# Altium PCB SENSEI_Base-Board.PcbDoc (part 6 of 10)
Units mm, origin at the board's own origin, x right, y up, seen from the top; angles counter-clockwise.
Board outline 51.6 x 28.1 mm, 8 copper layers (Top Sig/Pwr, GND1, Sig1, GND2, Sig2, Pwr, GND3, Bot Sig/Pwr), stack 1.53 mm thick; 209 components, 201 nets, 1031 pads, 2222 vias.
Unrouted connection lines stored in the file: 214.
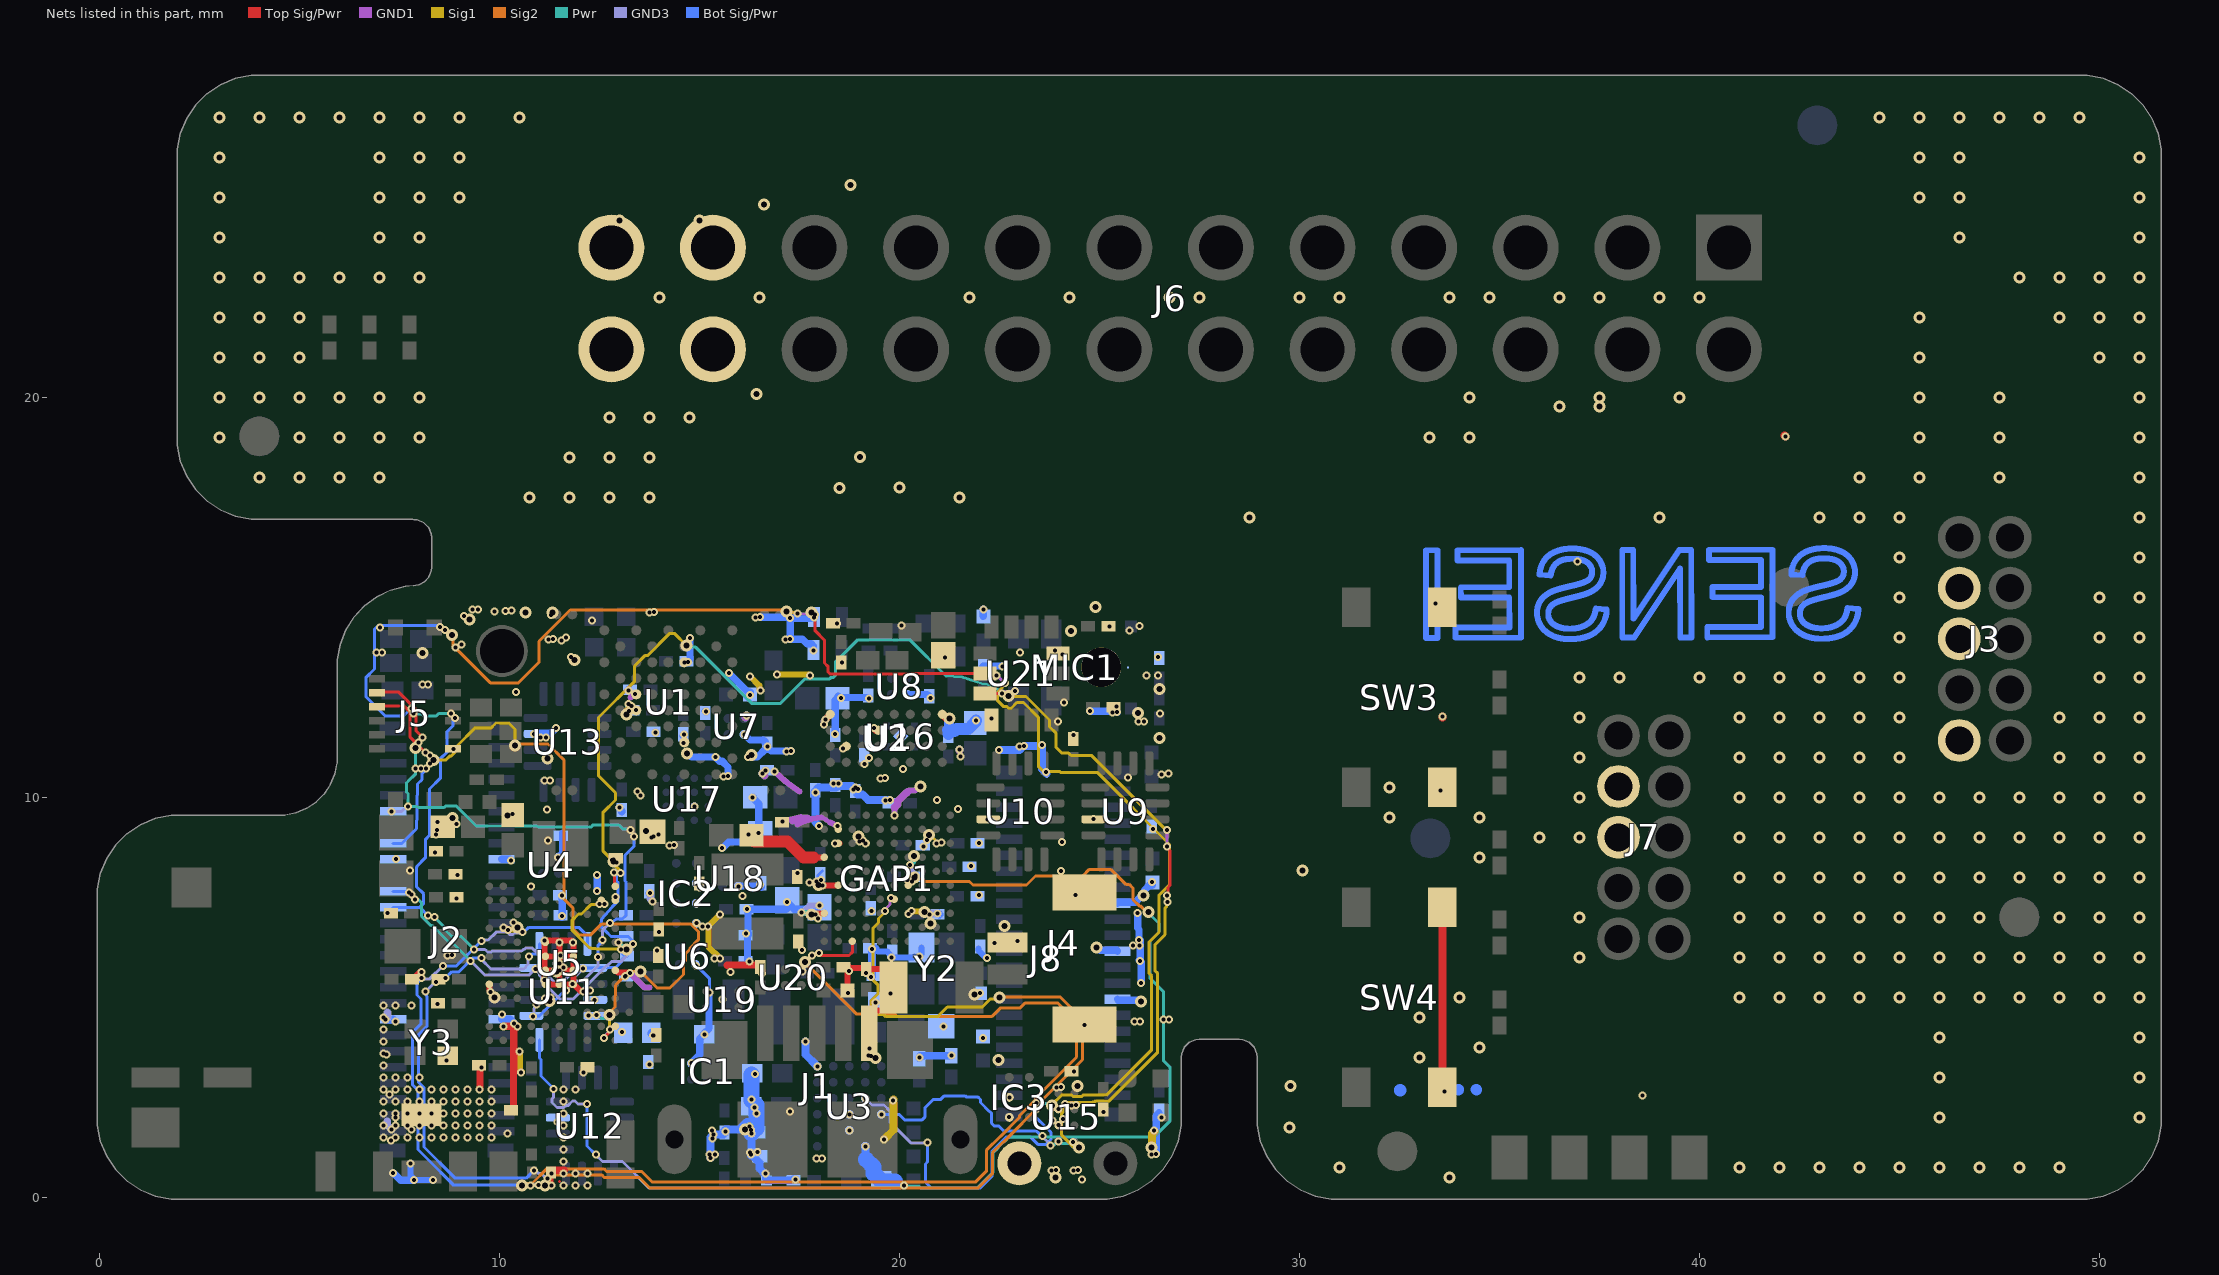
[diagram p11: the nets of this part, all layers, seen from the top]

## Via types
v1: diameter 0.2, hole 0.1, Top Sig/Pwr to GND1, 544 vias
v2: diameter 0.2, hole 0.1, GND3 to Bot Sig/Pwr, 436 vias
v3: diameter 0.2, hole 0.1, GND1 to Sig1, 385 vias
v4: diameter 0.3, hole 0.15, Sig1 to Pwr, 293 vias
v5: diameter 0.3, hole 0.15, Top Sig/Pwr to Bot Sig/Pwr, tented both sides, 284 vias
v6: diameter 0.2, hole 0.1, Pwr to GND3, 280 vias

## Nets (pads, with @x,y where several pads share a name; then routed paths per layer and width w, separated by ;. In a path a pad name is that pad's centre, name@x,y a point inside that pad or via, vN(x,y) a via of type N, cw(c..) or ccw(c..) an arc to the next point about the centre after c; other vN are vias at no path point) (continued)
GND: (continued)
  Bot Sig/Pwr w0.146: 42.679,15.182 42.68,15.183 42.682,15.183 42.683,15.184 42.685,15.184 42.686,15.185 42.688,15.185 42.689,15.186 42.691,15.187 42.692,15.187 42.694,15.188 42.695,15.188 42.697,15.189 42.699,15.189 42.7,15.19 42.702,15.19 42.703,15.191 42.705,15.191 42.706,15.192 42.708,15.192 42.71,15.193 42.711,15.193 42.713,15.194 42.714,15.194 42.716,15.195 42.718,15.195 42.719,15.196 42.721,15.197 42.723,15.197 42.724,15.198 42.726,15.198 42.728,15.199 42.729,15.199 42.731,15.2 42.733,15.2 42.734,15.201 42.736,15.201 42.738,15.202 42.739,15.202 42.741,15.203 42.743,15.204 42.745,15.204 42.746,15.205 42.748,15.205 42.75,15.206 42.752,15.206 42.754,15.207 42.755,15.207 42.757,15.208 42.759,15.208 42.761,15.209 42.763,15.21 42.764,15.21 42.766,15.211 42.768,15.211 42.77,15.212 42.772,15.212 42.774,15.213 42.775,15.213 42.777,15.214 42.779,15.215 42.781,15.215 42.783,15.216 42.785,15.216 42.787,15.217 42.789,15.217 42.791,15.218 42.793,15.218 42.795,15.219 42.796,15.22 42.798,15.22 42.8,15.221 42.802,15.221 42.804,15.222 42.806,15.222 42.808,15.223 42.81,15.224 42.812,15.224 42.814,15.225 42.817,15.225 42.819,15.226 42.822,15.227 42.824,15.228 42.827,15.228 42.83,15.229 42.832,15.23 42.835,15.23 42.837,15.231 42.84,15.232 42.843,15.233 42.845,15.233 42.848,15.234 42.851,15.235 42.853,15.235 42.856,15.236 42.859,15.237 42.861,15.238 42.864,15.238 42.867,15.239 42.87,15.24 42.872,15.241 42.875,15.241 42.878,15.242 42.881,15.243 42.883,15.244 42.886,15.244 42.889,15.245 42.892,15.246 42.895,15.246 42.898,15.247 42.9,15.248 42.903,15.249 42.906,15.249 42.909,15.25 42.912,15.251 42.915,15.252 42.918,15.252 42.921,15.253 42.924,15.254 42.927,15.255 42.93,15.255 42.933,15.256 42.936,15.257 42.939,15.258 42.942,15.258 42.945,15.259 42.948,15.26 42.951,15.261 42.954,15.262 42.957,15.262 42.96,15.263 42.963,15.264 42.966,15.265 42.969,15.265 42.972,15.266 42.976,15.267 42.979,15.268 42.982,15.268 42.985,15.269 42.988,15.27 42.991,15.271 42.995,15.272 42.999,15.273 43.003,15.274 43.007,15.274 43.011,15.275 43.015,15.276 43.019,15.277 43.023,15.278 43.027,15.279 43.031,15.28 43.035,15.281 43.039,15.282 43.043,15.283 43.047,15.284 43.051,15.285 43.055,15.286 43.059,15.287 43.063,15.288 43.067,15.289 43.071,15.29 43.076,15.291 43.08,15.292 43.084,15.292 43.088,15.293 43.092,15.294 43.096,15.295 43.1,15.296 43.103,15.297 43.107,15.298 43.11,15.298 43.113,15.299 43.117,15.3 43.12,15.301 43.124,15.302 43.127,15.302 43.131,15.303 43.134,15.304 43.137,15.305 43.141,15.306 43.144,15.306 43.147,15.307 43.151,15.308 43.154,15.309 43.157,15.31 43.16,15.31 43.164,15.311 43.167,15.312 43.17,15.313 43.173,15.314 43.177,15.314 43.18,15.315 43.183,15.316 43.186,15.317 43.189,15.318 43.192,15.318 43.195,15.319 43.199,15.32 43.202,15.321 43.205,15.322 43.208,15.322 43.21,15.323 43.213,15.324 43.215,15.324 43.217,15.325 43.22,15.326 43.222,15.326 43.225,15.327 43.227,15.328 43.229,15.328 43.232,15.329 43.234,15.329 43.237,15.33 43.239,15.331 43.241,15.331 43.243,15.332 43.246,15.333 43.248,15.333 43.25,15.334 43.253,15.335 43.255,15.335 43.257,15.336 43.26,15.336 43.262,15.337 43.264,15.338 43.266,15.338 43.268,15.339 43.271,15.34 43.273,15.34 43.275,15.341 43.277,15.342 43.279,15.342 43.282,15.343 43.284,15.343 43.286,15.344 43.288,15.345 43.29,15.345 43.292,15.346 43.294,15.347 43.297,15.347 43.299,15.348 43.301,15.349 43.303,15.349 43.305,15.35 43.307,15.35 43.309,15.351 43.311,15.352 43.313,15.352 43.315,15.353 43.317,15.354 43.319,15.354 43.321,15.355 43.323,15.355 43.325,15.356 43.327,15.357 43.329,15.357 43.331,15.358 43.333,15.359 43.335,15.359 43.337,15.36 43.339,15.361 43.341,15.361 43.343,15.362 43.345,15.362 43.347,15.363 43.349,15.364 43.35,15.364 43.352,15.365 43.354,15.366 43.356,15.366 43.358,15.367 43.36,15.367 43.362,15.368 43.363,15.369 43.365,15.369 43.367,15.37 43.369,15.371 43.371,15.371 43.372,15.372 43.374,15.372 43.376,15.373 43.378,15.374 43.379,15.374 43.381,15.375 43.382,15.375 43.383,15.376 43.385,15.376 43.386,15.377 43.387,15.377 43.388,15.378 43.39,15.378 43.391,15.379 43.392,15.379 43.393,15.38 43.395,15.38 43.396,15.38 43.397,15.381 43.398,15.381 43.4,15.382 43.401,15.382 43.402,15.383 43.403,15.383 43.404,15.384 43.406,15.384 43.407,15.385 43.408,15.385 43.409,15.386 43.41,15.386 ; 42.9,14.945 42.902,14.946 42.903,14.946 42.905,14.947 42.906,14.947 42.908,14.948 42.91,14.948 42.911,14.948 42.913,14.949 42.914,14.949 42.916,14.95 42.917,14.95 42.919,14.951 42.921,14.951 42.922,14.951 42.924,14.952 42.925,14.952 42.927,14.953 42.929,14.953 42.93,14.954 42.932,14.954 42.934,14.955 42.935,14.955 42.937,14.955 42.939,14.956 42.94,14.956 42.942,14.957 42.944,14.957 42.945,14.958 42.947,14.958 42.949,14.959 42.95,14.959 42.952,14.96 42.954,14.96 42.956,14.96 42.957,14.961 42.959,14.961 42.961,14.962 42.963,14.962 42.964,14.963 42.966,14.963 42.968,14.964 42.97,14.964 42.972,14.965 42.973,14.965 42.975,14.966 42.977,14.966 42.979,14.967 42.981,14.967 42.983,14.968 42.984,14.968 42.986,14.969 42.988,14.969 42.99,14.969 42.992,14.97 42.994,14.97 42.996,14.971 42.997,14.971 42.999,14.972 43.001,14.972 43.003,14.973 43.005,14.973 43.007,14.974 43.009,14.974 43.011,14.975 43.013,14.975 43.015,14.976 43.017,14.976 43.019,14.977 43.021,14.977 43.023,14.978 43.025,14.978 43.027,14.979 43.029,14.979 43.031,14.98 43.033,14.98 43.035,14.981 43.037,14.982 43.04,14.982 43.042,14.983 43.045,14.984 43.048,14.984 43.05,14.985 43.053,14.986 43.055,14.986 43.058,14.987 43.061,14.987 43.063,14.988 43.066,14.989 43.069,14.989 43.071,14.99 43.074,14.991 43.077,14.992 43.079,14.992 43.082,14.993 43.085,14.994 43.088,14.994 43.09,14.995 43.093,14.996 43.096,14.996 43.099,14.997 43.101,14.998 43.104,14.998 43.107,14.999 43.11,15 43.113,15 43.116,15.001 43.118,15.002 43.121,15.003 43.124,15.003 43.127,15.004 43.13,15.005 43.133,15.005 43.136,15.006 43.139,15.007 43.142,15.007 43.145,15.008 43.148,15.009 43.151,15.01 43.154,15.01 43.157,15.011 43.16,15.012 43.162,15.012 43.166,15.013 43.169,15.014 43.173,15.015 43.176,15.016 43.18,15.017 43.183,15.018 43.187,15.019 43.191,15.019 43.194,15.02 43.198,15.021 43.201,15.022 43.204,15.023 43.208,15.024 43.211,15.025 43.215,15.025 43.218,15.026 43.222,15.027 43.225,15.028 43.228,15.029 43.232,15.03 43.235,15.031 43.238,15.032 43.242,15.032 43.245,15.033 43.248,15.034 43.252,15.035 43.255,15.036 43.258,15.037 43.261,15.038 43.265,15.038 43.268,15.039 43.271,15.04 43.274,15.041 43.277,15.042 43.281,15.043 43.284,15.044 43.287,15.044 43.29,15.045 43.293,15.046 43.296,15.047 43.299,15.048 43.302,15.049 43.305,15.049 43.308,15.05 43.311,15.051 43.313,15.052 43.316,15.052 43.318,15.053 43.321,15.054 43.323,15.055 43.326,15.055 43.328,15.056 43.331,15.057 43.333,15.057 43.336,15.058 43.338,15.059 43.341,15.059 43.343,15.06 43.345,15.061 43.348,15.062 43.35,15.062 43.353,15.063 43.355,15.064 43.357,15.064 43.36,15.065 43.362,15.066 43.364,15.066 43.367,15.067 43.369,15.068 43.371,15.069 43.374,15.069 43.376,15.07 43.378,15.071 43.38,15.071 43.383,15.072 43.385,15.073 43.387,15.073 43.389,15.074 43.392,15.075 43.394,15.075 43.396,15.076 43.398,15.077 43.4,15.078 43.403,15.078 43.405,15.079 43.407,15.08 43.409,15.08 43.411,15.081 43.413,15.082 43.415,15.082 43.418,15.083 43.42,15.084 43.422,15.084 43.424,15.085 43.426,15.086 43.428,15.086 43.43,15.087 43.432,15.088 43.434,15.089 43.436,15.089 43.438,15.09 43.44,15.091 43.442,15.091 43.444,15.092 43.446,15.093 43.448,15.093 43.45,15.094 43.452,15.095 43.454,15.095 43.455,15.096 43.457,15.096 43.458,15.097 43.46,15.097 43.461,15.098 43.463,15.098 43.464,15.099 43.466,15.1 43.467,15.1 43.469,15.101 43.47,15.101 43.472,15.102 43.473,15.102 43.475,15.103 43.476,15.103 43.478,15.104 43.479,15.104 43.481,15.105 43.482,15.105 43.484,15.106 43.485,15.107 43.487,15.107 43.488,15.108 43.489,15.108 43.491,15.109 43.492,15.109 43.494,15.11 43.495,15.11 43.496,15.111 43.498,15.111 43.499,15.112 43.501,15.112 43.502,15.113 43.503,15.114 43.505,15.114 43.506,15.115 43.507,15.115 43.509,15.116 43.51,15.116 43.511,15.117 43.513,15.117 43.514,15.118 43.515,15.118 43.517,15.119 43.518,15.119 43.519,15.12 43.521,15.12 43.522,15.121 43.523,15.122 43.524,15.122 43.526,15.123 43.527,15.123 43.528,15.124 43.529,15.124 43.531,15.125 43.532,15.125 43.533,15.126 43.534,15.126 43.536,15.127 43.537,15.127 43.538,15.128 43.539,15.128 43.54,15.129 ; 43.493,15.878 43.49,15.88 43.488,15.882 43.485,15.883 43.483,15.885 43.48,15.887 43.478,15.889 43.476,15.89 43.473,15.892 43.471,15.893 43.469,15.895 43.466,15.896 43.464,15.898 43.462,15.899 43.46,15.9 43.458,15.902 43.455,15.903 43.453,15.904 43.451,15.906 43.449,15.907 43.446,15.908 43.444,15.909 43.442,15.91 43.44,15.912 43.438,15.913 43.436,15.914 43.434,15.915 43.432,15.916 43.43,15.917 43.427,15.918 43.425,15.919 43.423,15.92 43.421,15.921 43.419,15.922 43.416,15.923 43.414,15.924 43.412,15.925 43.41,15.926 43.407,15.927 43.405,15.928 43.403,15.929 43.4,15.93 43.398,15.93 43.396,15.931 43.393,15.932 43.391,15.933 43.389,15.934 43.386,15.935 43.384,15.936 43.382,15.936 43.38,15.937 43.378,15.938 43.376,15.938 43.374,15.939 43.372,15.94 43.369,15.94 43.367,15.941 43.365,15.942 43.363,15.942 43.361,15.943 43.359,15.944 43.356,15.944 43.354,15.945 43.352,15.946 43.35,15.946 43.347,15.947 43.345,15.947 43.343,15.948 43.341,15.949 43.338,15.949 43.336,15.95 43.334,15.95 43.331,15.951 43.329,15.951 43.327,15.952 43.324,15.953 43.322,15.953 43.32,15.954 43.317,15.954 43.315,15.955 43.312,15.955 43.31,15.956 43.308,15.956 43.305,15.957 43.303,15.957 43.3,15.958 43.298,15.958 43.295,15.959 43.293,15.959 43.29,15.959 43.288,15.96 43.285,15.96 43.283,15.961 43.28,15.961 43.278,15.962 43.275,15.962 43.273,15.962 43.27,15.963 43.267,15.963 43.265,15.963 43.262,15.964 43.26,15.964 43.257,15.965 43.254,15.965 43.252,15.965 43.249,15.966 43.246,15.966 43.244,15.966 43.241,15.967 43.238,15.967 43.236,15.967 43.233,15.967 43.23,15.968 43.227,15.968 43.225,15.968 43.222,15.969 43.219,15.969 43.216,15.969 43.214,15.969 43.211,15.97 43.208,15.97 43.205,15.97 43.202,15.97 43.199,15.97 43.197,15.971 43.194,15.971 43.191,15.971 43.188,15.971 43.185,15.971 43.182,15.971 43.179,15.972 43.176,15.972 43.173,15.972 43.17,15.972 43.168,15.972 43.165,15.972 43.162,15.972 43.158,15.973 43.155,15.973 43.151,15.973 43.148,15.973 43.144,15.973 43.14,15.973 43.137,15.973 43.133,15.973 43.13,15.973 43.126,15.973 43.122,15.973 43.119,15.973 43.115,15.973 43.112,15.973 43.109,15.973 43.105,15.973 43.102,15.973 43.098,15.973 43.095,15.973 43.091,15.973 43.088,15.973 43.084,15.973 43.081,15.973 43.078,15.973 43.074,15.973 43.071,15.973 43.067,15.973 43.064,15.972 43.061,15.972 43.057,15.972 43.054,15.972 43.051,15.972 43.047,15.972 43.044,15.971 43.041,15.971 43.037,15.971 43.034,15.971 43.031,15.97 43.028,15.97 43.024,15.97 43.021,15.97 43.018,15.969 43.015,15.969 43.012,15.969 43.008,15.968 43.005,15.968 43.002,15.968 42.999,15.967 42.996,15.967 42.993,15.967 42.99,15.966 42.986,15.966 42.983,15.966 42.98,15.965 42.977,15.965 42.974,15.964 42.971,15.964 42.968,15.963 42.965,15.963 42.962,15.963 42.959,15.962 42.956,15.962 42.953,15.961 42.95,15.961 42.947,15.96 42.944,15.96 42.942,15.959 42.939,15.958 42.936,15.958 42.933,15.957 42.93,15.957 42.927,15.956 42.924,15.956 42.921,15.955 42.919,15.954 42.915,15.954 42.912,15.953 42.909,15.952 42.906,15.951 42.903,15.95 42.9,15.95 42.897,15.949 42.894,15.948 42.89,15.947 42.887,15.946 42.884,15.946 42.881,15.945 42.878,15.944 42.875,15.943 42.872,15.942 42.869,15.941 42.866,15.94 42.863,15.939 42.861,15.938 42.858,15.937 42.855,15.936 42.852,15.935 42.849,15.934 42.846,15.933 42.843,15.932 42.841,15.931 42.837,15.93 42.834,15.929 42.831,15.927 42.828,15.926 42.825,15.925 42.822,15.923 42.819,15.922 42.816,15.921 42.813,15.919 42.81,15.918 42.807,15.917 42.804,15.915 42.8,15.913 42.797,15.912 42.794,15.91 42.791,15.908 42.788,15.907 42.784,15.905 42.781,15.903 42.778,15.901 42.774,15.899 42.771,15.897 42.767,15.895 42.764,15.893 42.76,15.89 42.756,15.888 42.752,15.885 42.748,15.882 42.744,15.879 42.74,15.876 42.735,15.873 42.731,15.869 42.728,15.867 ccw(c42.969,15.573) 42.718,15.859 ccw(c42.967,15.576) 42.704,15.846 ccw(c42.966,15.578) 42.672,15.809 ccw(c42.97,15.574) 42.664,15.8 ccw(c42.973,15.572) 42.659,15.792 ccw(c42.976,15.569) 42.654,15.785 ccw(c42.98,15.567) 42.65,15.779 42.646,15.773 42.643,15.767 42.64,15.762 42.637,15.757 42.634,15.752 42.632,15.748 42.63,15.743 42.627,15.739 42.625,15.734 42.623,15.73 42.621,15.726 42.619,15.722 42.618,15.718 42.616,15.714 42.614,15.71 42.613,15.706 42.611,15.703 42.61,15.699 42.609,15.695 42.607,15.691 42.606,15.688 42.605,15.684 42.603,15.68 42.602,15.677 42.601,15.673 42.6,15.67 42.599,15.666 42.598,15.663 42.597,15.659 42.596,15.656 42.595,15.652 42.594,15.649 42.593,15.645 42.592,15.642 42.591,15.639 42.591,15.635 42.59,15.632 42.589,15.629 42.588,15.625 42.588,15.622 42.587,15.618 42.586,15.615 42.585,15.612 42.585,15.608 42.584,15.605 42.584,15.601 42.583,15.598 42.582,15.594 42.582,15.59 42.581,15.587 42.581,15.583 42.58,15.58 42.58,15.576 42.579,15.573 42.579,15.57 42.578,15.567 42.578,15.563 42.577,15.56 42.577,15.557 42.577,15.554 42.299,15.573 42.299,15.58 42.299,15.587 42.3,15.595 42.3,15.602 42.301,15.609 42.302,15.617 42.302,15.625 42.303,15.633 42.304,15.641 42.305,15.649 42.307,15.658 42.308,15.667 42.31,15.677 42.312,15.687 42.314,15.698 42.316,15.709 cw(c42.968,15.559) 42.319,15.722 cw(c42.961,15.56) 42.323,15.736 cw(c42.955,15.562) 42.328,15.752 cw(c42.948,15.564) 42.335,15.773 cw(c42.941,15.566) 42.387,15.888 cw(c42.954,15.559) 42.395,15.902 cw(c42.96,15.556) 42.403,15.915 42.406,15.918 cw(c42.898,15.596) 42.416,15.933 cw(c42.893,15.6) 42.43,15.953 cw(c42.89,15.602) 42.491,16.021 cw(c42.897,15.595) 42.504,16.033 cw(c42.901,15.59) 42.514,16.042 cw(c42.905,15.586) 42.524,16.05 cw(c42.909,15.581) 42.533,16.057 42.541,16.063 42.548,16.069 42.556,16.074 42.563,16.079 42.569,16.084 42.576,16.088 42.582,16.092 42.589,16.096 42.595,16.1 42.601,16.104 42.607,16.108 42.613,16.111 42.619,16.114 42.624,16.117 42.63,16.12 42.635,16.123 42.641,16.126 42.646,16.129 42.652,16.132 42.657,16.134 42.662,16.137 42.668,16.139 42.673,16.142 42.678,16.144 42.683,16.146 42.689,16.149 42.692,16.15 42.703,16.155 42.714,16.159 42.724,16.163 42.734,16.166 42.744,16.17 42.753,16.173 42.762,16.176 42.771,16.179 42.78,16.182 42.789,16.184 42.797,16.187 42.806,16.189 42.814,16.192 42.823,16.194 42.831,16.196 42.839,16.198 42.847,16.2 42.855,16.201 42.862,16.203 42.87,16.205 42.878,16.206 42.885,16.208 42.893,16.209 42.901,16.211 42.908,16.212 42.916,16.213 42.923,16.214 42.931,16.215 42.938,16.216 42.946,16.217 42.953,16.218 42.96,16.219 42.967,16.22 42.975,16.221 42.982,16.222 42.989,16.223 42.996,16.223 43.004,16.224 43.011,16.224 43.018,16.225 43.025,16.226 43.032,16.226 43.039,16.226 43.046,16.227 43.053,16.227 43.061,16.228 43.068,16.228 43.075,16.228 43.082,16.228 43.089,16.228 43.096,16.229 43.104,16.229 43.111,16.229 43.118,16.229 43.121,16.229 43.13,16.229 43.138,16.229 43.146,16.229 43.155,16.228 43.163,16.228 43.172,16.228 43.18,16.228 43.189,16.227 43.198,16.227 43.207,16.226 43.215,16.225 43.224,16.225 43.233,16.224 43.242,16.223 43.252,16.222 43.261,16.221 43.27,16.22 43.28,16.219 43.29,16.217 43.3,16.216 43.31,16.214 43.32,16.213 43.33,16.211 43.341,16.209 43.352,16.207 43.364,16.204 43.376,16.201 43.388,16.199 43.4,16.195 43.414,16.192 43.427,16.188 43.442,16.184 cw(c43.167,15.285) 43.458,16.179 cw(c43.17,15.294) 43.475,16.173 cw(c43.173,15.302) 43.495,16.166 cw(c43.176,15.311) 43.518,16.157 43.523,16.155 43.528,16.153 43.533,16.151 43.537,16.149 43.542,16.147 43.547,16.145 43.551,16.143 43.556,16.141 43.56,16.138 43.565,16.136 43.57,16.134 43.575,16.131 43.579,16.129 43.584,16.126 43.589,16.124 43.594,16.121 43.599,16.118 43.604,16.116 43.609,16.113 43.614,16.11 43.619,16.107 43.624,16.104 43.629,16.1 43.634,16.097 43.64,16.094 43.645,16.09 43.651,16.086 43.657,16.082 43.663,16.078 43.669,16.074 43.675,16.069 43.681,16.064 43.688,16.058 43.695,16.052 cw(c43.337,15.627) 43.703,16.046 cw(c43.34,15.631) 43.711,16.038 cw(c43.344,15.635) 43.721,16.03 cw(c43.348,15.639) 43.732,16.019 cw(c43.352,15.643) 43.747,16.003 cw(c43.355,15.646) 43.798,15.936 43.802,15.931 43.805,15.926 43.809,15.92 43.812,15.915 43.815,15.909 43.819,15.903 43.822,15.897 43.826,15.89 43.829,15.883 43.833,15.876 43.837,15.869 43.841,15.861 43.845,15.852 cw(c43.325,15.619) 43.849,15.843 cw(c43.33,15.621) 43.853,15.833 cw(c43.335,15.623) 43.858,15.821 cw(c43.341,15.625) 43.863,15.806 cw(c43.346,15.627) 43.869,15.786 cw(c43.351,15.629) 43.889,15.694 cw(c43.34,15.627) 43.89,15.679 cw(c43.334,15.627) 43.891,15.666 cw(c43.328,15.626) 43.892,15.654 cw(c43.323,15.626) 43.893,15.644 43.893,15.634 43.893,15.626 43.893,15.621 43.893,15.615 43.893,15.61 43.892,15.604 43.892,15.598 43.892,15.592 43.892,15.586 43.891,15.579 43.89,15.573 43.89,15.566 43.889,15.559 43.888,15.552 43.887,15.544 43.886,15.536 cw(c43.382,15.62) 43.884,15.527 cw(c43.387,15.619) 43.882,15.517 cw(c43.392,15.618) 43.88,15.506 cw(c43.397,15.616) 43.877,15.493 cw(c43.402,15.615) 43.872,15.475 cw(c43.407,15.614) 43.84,15.395 cw(c43.398,15.618) 43.833,15.383 cw(c43.393,15.62) 43.828,15.373 cw(c43.389,15.623) 43.823,15.364 cw(c43.384,15.626) 43.818,15.356 43.816,15.354 cw(c43.419,15.604) 43.809,15.342 cw(c43.415,15.607) 43.803,15.333 cw(c43.411,15.61) 43.797,15.325 cw(c43.407,15.613) 43.792,15.318 43.787,15.312 43.782,15.306 43.777,15.3 43.773,15.295 43.769,15.29 43.764,15.286 43.76,15.281 43.756,15.277 43.752,15.273 43.748,15.269 43.745,15.265 43.741,15.261 43.737,15.257 43.733,15.254 43.729,15.25 43.726,15.247 43.722,15.244 43.718,15.24 43.715,15.237 43.711,15.234 43.707,15.231 43.704,15.228 43.7,15.225 43.697,15.223 43.693,15.22 43.69,15.217 43.686,15.214 43.683,15.212 43.679,15.209 43.675,15.206 43.672,15.204 43.668,15.201 43.665,15.199 43.661,15.197 43.658,15.194 43.654,15.192 43.651,15.189 43.647,15.187 43.643,15.185 43.64,15.182 43.636,15.18 43.632,15.178 43.629,15.175 43.625,15.173 43.622,15.171 43.618,15.169 43.615,15.167 43.611,15.165 43.608,15.163 43.604,15.161 43.6,15.159 43.597,15.157 43.593,15.155 43.589,15.153 43.586,15.151 43.583,15.149 ; 43.494,15.877 43.495,15.875 43.497,15.874 43.499,15.872 43.501,15.871 43.503,15.869 43.505,15.868 43.507,15.866 43.508,15.865 43.51,15.863 43.512,15.861 43.514,15.86 43.516,15.858 43.518,15.856 43.52,15.854 43.521,15.853 43.523,15.851 43.525,15.849 43.527,15.847 43.529,15.845 43.531,15.843 43.532,15.841 43.534,15.84 43.536,15.838 43.538,15.836 43.54,15.834 43.542,15.831 43.544,15.829 43.545,15.827 43.547,15.825 43.549,15.823 43.551,15.82 43.553,15.818 43.555,15.816 43.557,15.813 43.559,15.81 43.561,15.808 43.563,15.805 43.565,15.802 43.567,15.799 43.569,15.796 43.571,15.793 43.573,15.79 43.575,15.786 43.577,15.782 cw(c43.336,15.643) 43.58,15.778 cw(c43.338,15.644) 43.582,15.773 cw(c43.341,15.645) 43.585,15.768 cw(c43.343,15.647) 43.588,15.761 cw(c43.346,15.648) 43.592,15.753 cw(c43.349,15.649) 43.602,15.726 cw(c43.348,15.649) 43.606,15.711 cw(c43.346,15.648) 43.608,15.702 cw(c43.343,15.648) 43.609,15.695 cw(c43.34,15.647) 43.61,15.689 cw(c43.337,15.647) 43.611,15.684 43.611,15.679 43.612,15.675 43.612,15.671 43.613,15.667 43.613,15.663 43.613,15.659 43.613,15.656 43.613,15.652 43.613,15.649 43.613,15.645 43.613,15.643 43.613,15.641 43.613,15.638 43.613,15.636 43.613,15.634 43.613,15.631 43.613,15.629 43.613,15.626 43.613,15.624 43.613,15.621 43.612,15.618 43.612,15.616 43.612,15.613 43.612,15.61 43.611,15.607 43.611,15.605 43.61,15.602 43.61,15.599 43.609,15.596 43.609,15.592 43.608,15.589 43.608,15.586 43.607,15.582 43.606,15.578 43.605,15.574 43.604,15.57 cw(c43.365,15.636) 43.602,15.565 cw(c43.367,15.635) 43.601,15.56 cw(c43.37,15.635) 43.599,15.554 cw(c43.372,15.634) 43.596,15.547 cw(c43.375,15.633) 43.587,15.526 cw(c43.375,15.633) 43.579,15.511 cw(c43.372,15.634) 43.574,15.504 cw(c43.37,15.636) 43.571,15.499 cw(c43.368,15.637) 43.568,15.495 cw(c43.366,15.638) 43.565,15.491 43.563,15.488 43.56,15.484 43.558,15.481 43.555,15.478 43.553,15.476 43.551,15.473 43.549,15.471 43.546,15.469 43.544,15.466 43.542,15.464 43.54,15.462 43.538,15.46 43.536,15.458 43.534,15.456 43.532,15.455 43.531,15.453 43.529,15.451 ; 43.547,15.132 43.546,15.132 43.545,15.131 43.544,15.13 43.543,15.13 43.542,15.129 ; 37.11,15.373 37.112,15.374 ; 37.248,15.119 37.249,15.119 ; 43.54,15.129 43.542,15.129 ; 33.164,16.176 33.454,16.177 33.458,13.986 33.168,13.986 33.164,16.176 ; 33.907,13.987 35.542,13.989 35.538,16.18 33.955,16.177 33.955,15.919 35.249,15.921 35.25,15.25 34.038,15.248 34.039,14.991 35.25,14.993 35.252,14.247 33.907,14.245 33.907,13.987 ; 38.072,16.184 38.076,13.993 38.373,13.994 39.521,15.717 39.524,13.996 39.802,13.996 39.798,16.186 39.501,16.186 38.353,14.464 38.35,16.184 38.072,16.184 ; 40.199,13.997 41.834,13.999 41.83,16.19 40.246,16.187 40.247,15.929 41.541,15.931 41.542,15.26 40.33,15.258 40.33,15.001 41.542,15.003 41.543,14.257 40.199,14.255 40.199,13.997
  Bot Sig/Pwr w0.15: v2(7.775,0.85) 7.785,0.84 7.785,0.538 7.875,0.447 v2@7.875,0.434 ; v2(7.873,0.436) v2@7.875,0.434 ; v2@7.875,0.425 v2@7.875,0.434 ; v2@8.35,0.45 8.332,0.432 7.876,0.432 v2@7.875,0.434 ; v2(18,7.3) 18.004,7.304 C32.2@18.007,7.304 ; C29.2@19.29,7.174 v2(19.301,7.163) ; C34.2@19.321,6.227 19.321,6.206 v2(19.323,6.204) ; 19.45,6.175 19.45,6.163 19.473,6.14 19.702,6.14 19.811,6.031 v2(19.811,5.993) ; C36.2@19.808,5.988 19.811,5.991 v2(19.811,5.993) ; Y2.2@20.375,6.025 20.343,5.993 v2(19.811,5.993) ; v2(20.405,8.045) 20.405,8.029 C25.2@20.423,8.011 ; v2(20.5,6.025) 20.55,6.075 Y2.2@20.55,6.25 ; C35.2@21.975,6.221 21.975,6.175 v2@22.175,5.975
  Bot Sig/Pwr w0.18: v2(7.34,0.613) 7.346,0.613 7.534,0.425 v2@7.85,0.425 ; J2.8@10.055,4.45 10.275,4.45 10.372,4.353 v2(10.372,4.35) ; J2.8@10.072,4.463 v2(10.072,4.565) ; U13.3@10.925,11.6 11.289,11.6 11.418,11.729 v2(11.423,11.729) ; v2(11.472,8.494) 11.477,8.499 U4.B1@11.483,8.499 11.483,8.511 11.579,8.607 C19.2@11.579,9.11 ; C18.2@11.568,7.551 v2(11.563,7.545) 11.574,7.534 C53.2@11.574,7.04 ; v2(11.571,7.037) C53.2@11.574,7.04 ; C53.2@11.574,7.001 C53.2@11.574,7.04 ; C53.2@11.58,7.046 C53.2@11.574,7.04 ; v2(12.385,4.935) 12.397,4.935 U11.3@12.4,4.938 ; v2(12.448,8.054) v2(12.448,7.654) 12.448,7.652 v2@12.45,7.65 ; v2(12.999,9.751) 12.999,9.736 13.063,9.672 C82.2@13.063,9.634 ; C6.2@13.219,12.691 v2(13.225,12.675) ; C81.2@13.75,7.6 13.761,7.6 v2(13.772,7.611) ; C16.2@13.8,4.118 13.8,4.082 v2(13.838,4.044) ; v2(13.907,11.625) 13.909,11.627 C57.2@13.909,11.635 ; C97.2@14.6,11.525 14.6,11.543 v2(14.621,11.565) ; v5@14.675,11.1 14.716,11.1 14.813,11.004 15.405,11.004 v2(15.406,11.003) ; C7.2@14.725,13.4 14.769,13.444 14.769,13.975 v2(14.773,13.979) ; IC1.A3@14.8,3.35 14.801,3.36 15.009,3.569 15.009,3.963 C15.2@15.073,4.027 ; v2(14.875,9.773) U17.C2@14.875,9.775 ; IC2.D1@14.925,6.85 14.925,6.855 v2(14.927,6.857) ; IC2.C1@14.925,7.35 14.927,7.35 v2(14.931,7.347) ; C15.2@15.121,4.075 v2(15.125,4.075) ; C15.2@15.125,4.1 15.246,4.221 15.246,5.121 v2(15.25,5.125) ; C22.2@15.15,12.159 15.15,12.155 v2(15.165,12.14) ; v2@15.398,11 15.414,11 15.513,10.901 15.574,10.901 15.719,10.756 15.719,10.533 v2(15.723,10.529) ; v2(15.573,8.729) 15.579,8.729 15.735,8.885 16.435,8.885 C55.2@16.55,9 ; v2(15.748,13.104) 15.752,13.1 15.752,13.086 16.213,12.625 R11.1@16.275,12.625 ; U18.B1@15.975,7.775 15.975,7.769 v2(15.979,7.765) v2(15.979,7.765) 15.996,7.784 16.516,7.784 C85.2@16.55,7.75 ; U7.B1@16.119,11.568 v2(16.126,11.568) 16.131,11.568 16.267,11.433 16.609,11.433 16.65,11.391 C39.2@16.65,11.35 ; v2(16.173,6.6) 16.209,6.6 C20.2@16.217,6.608 ; v2(16.198,7.204) C84.2@16.202,7.2 ; C21.2@16.204,5.9 16.204,6.529 C20.2@16.225,6.55 ; v2(16.223,11.004) 16.227,11.008 16.458,11.008 16.65,11.2 C39.2@16.7,11.2 ; C20.2@16.225,6.6 C20.2@16.217,6.608 ; R11.1@16.263,12.575 16.263,12.563 v2(16.269,12.558) ; v2(16.333,9.993) 16.34,9.993 C24.2@16.348,10 ; C24.2@16.375,9.95 16.486,9.839 C55.2@16.486,9.111 ; C55.2@16.473,9.125 C55.2@16.486,9.111 ; v2(16.486,9.104) C55.2@16.486,9.111 ; C23.2@16.646,10.675 16.651,10.675 v2(16.656,10.669) ; v2(16.653,0.6) 16.657,0.596 16.657,0.568 16.657,0.443 RT1.2@16.675,0.425 C12.2@17.25,0.425 ; v2(16.701,11.273) C39.2@16.7,11.296 ; C39.2@16.725,11.25 16.725,11.225 16.791,11.159 16.816,11.159 16.821,11.154 v2(17.298,11.154) ; C87.2@17.2,7.375 17.375,7.2 C32.2@17.925,7.2 ; C87.2@17.25,7.275 17.175,7.2 C84.2@16.202,7.2 ; v2@17.25,13.95 17.58,13.95 17.693,13.837 17.797,13.837 17.858,13.777 D2.2@17.857,13.677 v2(17.858,13.673) ; C12.2@17.308,0.425 17.333,0.45 v2(17.4,0.45) ; v2@17.35,14.475 17.851,14.475 v2(17.872,14.495) D3.2@17.871,14.502 ; v2(18.398,11.579) 18.4,11.581 18.4,12.425 C10.2@18.45,12.475 ; C10.2@18.475,12.525 18.504,12.496 19.225,12.496 19.241,12.479 v2(19.241,12.465) ; C10.2@18.502,12.475 18.508,12.481 v2(18.539,12.481) ; U16.3@20.032,11.525 20.032,11.513 v2(20.034,11.511) ; U8.B1@20.2,12.575 20.209,12.566 20.706,12.566 C48.2@20.734,12.539 ; C14.2@20.5,3.475 v2(20.5,3.5) ; C14.2@20.526,3.538 C13.2@21.3,3.538 ; R13.1@22.1,14.525 22.101,14.526 22.101,14.699 v2(22.102,14.7) ; v2(25.956,7.101) 25.96,7.097 25.96,6.732 25.994,6.698 25.994,6.438 26.006,6.427 v2@26.007,6.427 ; v2@26,5.925 26.048,5.877 v2(26.048,5.354) ; v2(26.023,5.904) v2@26.023,6.427 ; v2@26.425,1.1 26.425,2.043 C92.2@26.495,2.113 ; C84.2@16.202,7.2 16.217,7.185 C20.2@16.217,6.608
  Bot Sig/Pwr w0.185: J2.18@10.055,8.45 10.275,8.45 10.293,8.432 10.293,8.425 v2(10.296,8.422) ; v2(16.523,14.504) 17.271,14.504 17.3,14.475 17.273,14.448 v2(17.273,13.954) ; C90.2@22.1,13.284 22.562,13.284 22.571,13.275 v2(22.575,13.275) ; v2(24.773,12.154) 25.419,12.154 25.448,12.125 v2@25.45,12.125 ; v5(24.924,6.242) 24.955,6.242 25.025,6.173 25.432,6.173 J4.21@25.455,6.15 ; J4.27@25.455,4.95 25.478,4.927 25.99,4.927 26.017,4.9 v5(26.049,4.9) ; J4.15@25.455,7.35 25.478,7.373 25.9,7.373 26.076,7.549 v5(26.107,7.549) 26.129,7.571 26.129,7.679 26.25,7.8 R12.1@26.325,7.8
  Bot Sig/Pwr w0.2: v2(7.156,4.445) 7.161,4.45 J2.43@7.345,4.45 ; v2(15.274,0.98) 15.274,1.499 v2(15.35,1.575) 15.6,1.575 15.65,1.625 v2(15.65,1.65) ; R2.1@15.625,1.625 15.625,1.675 15.65,1.7 16,1.7 16.187,1.887 16.295,1.887 ; v2(16.3,1.6) 16.3,1.175 C1.2@16.325,1.15 ; v2(16.454,1.13) 16.377,1.13 16.298,1.05 16.32,1.05 16.5,0.87 16.5,0.725 v2@16.657,0.568 ; v2(17.65,3.9) 17.65,3.575 U3.E6@17.943,3.282 ; C9.2@17.874,10.041 17.874,10.099 17.874,10.135 17.981,10.242 18.417,10.242 C26.2@18.45,10.275 ; C9.2@17.9,10.025 17.9,9.377 v2(17.998,9.279) ; v2(18.475,10.35) 18.475,10.288 18.481,10.281 18.819,10.281 C37.2@18.925,10.175 ; C37.2@18.95,10.075 19.077,10.075 19.214,9.938 19.764,9.938 v2(19.773,9.929) ; v2(19.15,1.275) 19.154,1.271 19.154,0.959 19.168,0.945 ; v2(19.298,5.504) 19.311,5.504 19.322,5.515 19.322,6.147 C34.2@19.4,6.225 ; v2(20.95,7.1) 20.979,7.1 C27.2@21.004,7.075 ; v2(22.498,11.179) 23.004,11.179 v2@23.1,11.275 ; v2(23.123,11.279) 23.504,11.279 v2@23.525,11.3 ; v2(23.573,11.304) 23.573,10.702 v2@23.675,10.6
  Bot Sig/Pwr w0.25: C99.2@21.195,11.681 21.24,11.681 21.24,11.931 21.261,11.952 v5(21.261,11.964)
  Bot Sig/Pwr w0.28: 33.983,2.693 ccw(c33.981,2.693) 33.983,2.693 ; 34.429,2.693 ccw(c34.427,2.693) 34.429,2.693
  Bot Sig/Pwr w0.3: C99.2@21.225,11.579 21.225,11.625 21.256,11.656 21.386,11.656 21.432,11.702 21.72,11.702 21.9,11.882 21.9,11.905 21.908,11.905 v2(21.917,11.914)
  Bot Sig/Pwr w0.312: 32.523,2.676 ccw(c32.521,2.676) 32.523,2.676
  Bot Sig/Pwr w0.4: v2(16.3,1.6) 16.425,1.725 16.425,2.306 16.311,2.42 v2(16.311,2.451) 16.3,2.461 C43.2@16.3,3.075 ; 19.168,0.945 19.357,0.755 19.357,0.6 19.532,0.425 C42.2@19.554,0.425 19.579,0.4 19.897,0.4
  other v1: 11.3,0.3 11.6,0.3 11.9,0.3 12.2,0.3 11.3,0.6 11.6,0.6 11.9,0.6 12.2,0.6 11.6,0.9 17.925,0.975 15.25,1.075 11.6,1.2 15.325,1.475 7.1,1.5 7.4,1.5 7.7,1.5 8,1.5 8.3,1.5 8.6,1.5 8.9,1.5 9.2,1.5 9.5,1.5 9.8,1.5 11.6,1.5 10.2,1.6 7.1,1.8 7.4,1.8 7.7,1.8 8,1.8 8.3,1.8 8.6,1.8 8.9,1.8 9.2,1.8 9.5,1.8 9.8,1.8 11.6,1.8 7.1,2.1 7.7,2.1 8,2.1 8.3,2.1 8.6,2.1 8.9,2.1 9.2,2.1 9.5,2.1 9.8,2.1 11.6,2.1 7.1,2.4 7.4,2.4 7.7,2.4 8,2.4 8.3,2.4 8.6,2.4 8.9,2.4 9.2,2.4 9.5,2.4 9.8,2.4 11.6,2.4 38.575,2.55 7.1,2.7 7.4,2.7 7.7,2.7 8,2.7 8.3,2.7 8.6,2.7 8.9,2.7 9.2,2.7 9.5,2.7 9.8,2.7 11.6,2.7 11.9,2.7 7.1,3 7.4,3 7.7,3 8,3 24.368,3.141 7.1,3.3 7.1,3.6 7.1,3.9 7.1,4.2 24.636,4.301 25.875,4.4 26.6,4.45 7.1,4.5 7.1,4.8 7.4,4.8 7.8,4.8 8.461,4.826 11.836,5.326 15.786,5.626 15.375,5.975 17.566,6.184 25.838,6.301 22.386,6.351 22.961,6.401 15.075,6.775 7.211,7.101 16.086,7.526 24.411,7.551 15,7.75 17.461,8.101 24.861,9.451 13.45,10.15 18.9,10.25 11.125,10.425 26.725,10.6 7.9,10.725 8.861,11.201 11.025,11.5 24.361,11.551 25.975,11.9 8.075,12.825 26.175,13.05 14.625,13.375 18.562,13.366 6.925,13.625 9.05,13.825 11.55,13.925 25.75,14.175 10.153,14.654 9.325,14.7 36.95,15.9
  other v2: 8.348,0.429 23.923,0.679 24.473,0.679 26.423,1.079 24.348,1.379 18.75,1.675 11.45,1.883 24.098,1.954 26.55,2 18.75,2.075 16.425,2.1 24.423,2.304 24.048,2.754 17.95,3.275 13.75,3.325 14.801,3.356 21.3,3.55 22.098,3.979 13.073,4.129 21.1,4.275 19.4,4.875 22.023,5.103 16.25,5.9 22.198,5.979 8.823,6.054 25.998,6.429 17.198,7.379 21.998,7.554 16.523,7.804 14.925,7.84 26.323,7.879 24.048,8.154 21.798,8.279 7.423,8.454 14.373,8.804 21.998,8.854 24.073,8.879 26.348,9.204 21.473,9.704 20.948,9.929 18.973,10.204 19.648,10.479 20.098,10.704 19.248,10.979 10.873,11.579 25.448,12.129 20.782,12.483 10.423,12.629 14.723,13.379 11.798,13.504 26.473,13.504 11.348,13.954 17.273,14.479 9.123,14.529 11.298,14.554 13.873,14.629
  other v3: 24.57,0.448 18.07,0.973 15.395,1.073 7.295,1.423 15.32,1.673 26.37,1.673 17.27,2.148 19.845,2.423 10.545,3.123 26.02,4.398 26.745,4.448 12.27,5.173 26,6.3 15.22,6.773 7.745,7.623 7.77,8.173 11.22,8.923 8.42,9.073 11.195,9.698 13.525,10.05 11.27,10.423 25.72,10.498 26.55,10.575 8.045,10.723 11.17,11.498 23.97,11.898 26.12,11.898 26.52,12.098 24.12,12.373 16.525,12.675 8.22,12.823 26.462,13.048 7.07,13.623 23.02,13.623 23.895,13.673 8.901,13.746 11.67,13.998 7.02,14.248 26.009,14.288 20.05,14.3 12.32,14.423 10.3,14.675 9.47,14.698
  other v4: 23.9,0.5 24.454,2.784 22.479,3.434 9.875,5 21.875,5.075 22.629,6.784 20.775,6.848 10.2,9.55 11.2,10.975 16.304,11.059 26.504,11.484 25.971,12.104 26.504,12.709 11.879,13.434 8.079,13.609 24.298,14.163 9.25,14.45 10.65,14.625 11.325,14.625 17.8,14.625 24.907,14.755
  other v5: 33.75,0.5 31,0.75 41,0.75 42,0.75 43,0.75 44,0.75 45,0.75 46,0.75 47,0.75 48,0.75 49,0.75 29.75,1.75 46,2 51,2 29.786,2.786 46,3 51,3 33,3.5 34.5,3.75 46,4 51,4 33,4.5 34,5 41,5 42,5 43,5 44,5 45,5 46,5 47,5 48,5 49,5 50,5 51,5 37,6 41,6 42,6 43,6 44,6 45,6 46,6 47,6 48,6 49,6 50,6 51,6 37,7 41,7 42,7 43,7 44,7 45,7 46,7 47,7 49,7 50,7 51,7 41,8 42,8 43,8 44,8 45,8 46,8 47,8 48,8 49,8 50,8 51,8 30.075,8.175 34.5,8.5 36,9 37,9 41,9 42,9 43,9 44,9 45,9 46,9 47,9 48,9 49,9 50,9 51,9 32.25,9.5 34.5,9.5 37,10 41,10 42,10 43,10 44,10 45,10 46,10 47,10 48,10 49,10 50,10 51,10 32.25,10.25 37,11 41,11 42,11 43,11 44,11 45,11 49,11 50,11 51,11 14.694,11.09 37,12 41,12 42,12 43,12 44,12 45,12 49,12 50,12 51,12 37,13 38,13 40,13 41,13 42,13 43,13 44,13 45,13 50,13 51,13 45,14 50,14 51,14 45,15 50,15 51,15 45,16 51,16 28.75,17 39,17 43,17 44,17 45,17 51,17 10.75,17.5 11.75,17.5 12.75,17.5 13.75,17.5 21.5,17.5 18.5,17.729 20,17.75 4,18 5,18 6,18 7,18 44,18 45.5,18 47.5,18 51,18 11.75,18.5 12.75,18.5 13.75,18.5 19.016,18.502 3,19 5,19 6,19 7,19 8,19 33.25,19 34.25,19 45.5,19 47.5,19 51,19 12.75,19.5 13.75,19.5 14.75,19.5 36.5,19.776 37.5,19.776 3,20 4,20 5,20 6,20 7,20 8,20 34.25,20 37.5,20 39.5,20 45.5,20 47.5,20 51,20 16.432,20.079 3,21 4,21 5,21 45.5,21 50,21 51,21 3,22 4,22 5,22 45.5,22 49,22 50,22 51,22 14,22.5 16.5,22.5 21.75,22.5 24.25,22.5 26.75,22.5 27.5,22.5 30,22.5 31,22.5 33.75,22.5 34.75,22.5 36.5,22.5 37.5,22.5 39,22.5 40,22.5 3,23 4,23 5,23 6,23 7,23 8,23 48,23 49,23 50,23 51,23 3,24 7,24 8,24 46.5,24 51,24 13,24.415 15,24.425 16.614,24.821 3,25 7,25 8,25 9,25 45.5,25 46.5,25 51,25 18.779,25.313 3,26 7,26 8,26 9,26 45.5,26 46.5,26 51,26 3,27 4,27 5,27 6,27 7,27 8,27 9,27 10.5,27 44.5,27 45.5,27 46.5,27 47.5,27 48.5,27 49.5,27
  other v6: 23.8,0.675 24.35,0.675 26.3,1.075 7.8,1.7 16.375,2.25 24.3,2.3 7.25,2.575 23.925,2.75 7.175,3.575 7.4,4.4 8.7,6.05 14.25,8.8 19.65,9.925 18.85,10.2 18.352,10.346 19.525,10.475 15.6,10.525 19.125,10.837 17.175,11.15 23,11.275 25.325,12.125 11.225,13.95 17.15,13.95 16.4,14.5 13.75,14.625 9.875,14.65
I2C_A_SCL: J2.36 R26.2 U3.B4 U5.J11 U11.1 U15.C1 U21.13 | length 64.5
  Top Sig/Pwr w0.075: U5.J11@12.55,7.425 12.55,7.42 12.634,7.336 v1(12.634,7.332) ; v1(17.896,14.574) 17.896,14.161 18.131,13.927 18.131,13.359 18.213,13.276 18.213,13.144 18.281,13.076 20.278,13.076 20.301,13.1 U21.13@22.137,13.1 ; U15.C1@23.957,1.814 23.971,1.814 v1(23.978,1.807)
  GND1 w0.075: v3(12.499,7.335) 12.501,7.334 12.632,7.334 v1(12.634,7.332) ; v3(17.45,14.6) 17.463,14.587 17.883,14.587 v1(17.896,14.574) ; v1(22.425,13.05) 22.437,13.05 22.625,12.862 v3(22.638,12.862) ; v3(23.831,1.914) 23.851,1.914 23.958,1.807 v1(23.978,1.807)
  Sig2 w0.075: v4(8.82,14.061) 8.84,14.041 8.84,13.798 9.775,12.863 9.903,12.863 10.479,12.862 10.991,13.375 10.991,13.9 11.775,14.684 17.141,14.684 v4(17.175,14.65)
  GND3 w0.075: v2(7.8,12.225) 7.824,12.201 7.824,12.155 7.854,12.126 v6(7.854,12.092) ; v2(8.217,7.041) 8.235,7.024 8.357,7.024 v6(8.375,7.006) ; v2(8.52,14.257) 8.546,14.257 8.62,14.183 v6(8.646,14.183) ; v6(8.791,12.095) 8.791,12.09 8.888,11.992 v2(8.888,11.987) ; v6(9.369,6.199) 9.35,6.18 9.448,6.18 9.462,6.194 9.638,6.194 9.652,6.18 9.66,6.18 9.707,6.133 9.803,6.133 9.833,6.163 10.561,6.163 10.595,6.197 10.622,6.197 10.656,6.232 10.675,6.232 ; 10.676,6.232 10.812,6.232 10.816,6.228 10.825,6.228 10.99,6.063 10.99,5.94 11.115,5.816 11.115,5.704 11.211,5.608 11.211,5.541 11.408,5.344 11.541,5.344 11.578,5.381 11.584,5.381 11.765,5.561 11.941,5.561 v2(12.098,5.719) ; v6(12.975,6.375) 12.999,6.351 12.999,6.279 13.046,6.232 v2(13.046,6.199) ; v2(19.15,2.475) 19.318,2.307 19.618,2.307 19.763,2.163 19.763,1.887 20.287,1.362 20.687,1.362 v2(20.7,1.375) ; v2(23.399,2.183) 23.415,2.2 23.415,2.346 v6(23.431,2.363)
  Sig1 w0.075: v3(12.499,7.335) 12.478,7.315 12.287,7.315 12.056,7.084 11.995,7.084 11.993,7.082 11.98,7.082 11.814,6.916 11.814,6.681 12.263,6.232 12.296,6.232 12.307,6.221 12.411,6.221 12.424,6.208 13.167,6.208 v4(13.175,6.2) ; v4(17.175,14.65) 17.201,14.624 17.426,14.624 v3(17.45,14.6) ; v3(22.638,12.862) 22.638,12.829 22.581,12.772 22.581,12.753 22.507,12.679 22.507,12.674 22.458,12.625 22.458,12.498 22.458,12.413 22.596,12.275 22.681,12.275 22.722,12.234 22.804,12.234 22.939,12.369 23.106,12.369 23.475,12 23.475,10.775 23.61,10.64 24.018,10.64 24.033,10.625 24.95,10.625 26.757,8.818 26.757,7.812 26.488,7.543 26.488,7.244 26.495,7.236 26.495,6.628 26.237,6.37 26.237,5.609 26.311,5.536 26.311,3.686 25.188,2.563 24.604,2.563 24.562,2.521 24.345,2.521 24.304,2.563 24.066,2.563 23.814,2.31 v4(23.813,2.3) 23.822,2.291 23.822,1.923 v3(23.831,1.914)
  Pwr w0.075: v6(7.854,12.092) 7.867,12.078 8.066,12.078 8.113,12.032 8.423,12.032 8.487,12.095 v6(8.791,12.095) ; v6(8.375,7.006) 8.607,6.774 8.607,6.722 8.815,6.514 9.055,6.514 v6(9.369,6.199) ; v6(8.646,14.183) 8.672,14.183 8.794,14.061 v4(8.82,14.061) ; v6(12.975,6.375) 12.988,6.375 13.163,6.2 v4(13.175,6.2) ; v6(23.431,2.363) 23.436,2.358 23.528,2.358 23.543,2.343 23.77,2.343 v4(23.813,2.3)
  Bot Sig/Pwr w0.075: J2.36@7.345,7.25 8.008,7.25 ; v2(7.8,12.225) 7.608,12.033 7.148,12.033 6.663,12.518 6.663,12.99 6.882,13.21 6.882,14.205 6.972,14.296 8.424,14.296 8.463,14.257 v2(8.52,14.257) ; v2(8.217,7.041) 8.008,7.25 ; v2(8.888,11.987) 8.888,11.953 8.84,11.905 8.84,11.786 8.697,11.643 8.697,11.133 8.526,10.961 8.526,10.476 8.257,10.206 8.257,9.048 8.149,8.941 8.149,8.488 7.94,8.279 7.94,8.259 7.932,8.251 7.932,7.762 8.108,7.585 8.108,7.349 8.009,7.25 ; v2(12.098,5.719) 12.118,5.738 U11.1@12.35,5.738 ; U11.1@12.393,5.743 12.909,5.743 13.052,5.885 13.052,5.931 13.146,6.025 R26.2@13.191,6.025 ; v2(13.046,6.199) 13.052,6.193 13.052,6.119 13.123,6.047 R26.2@13.171,6.047 ; v2(20.7,1.375) 20.7,0.88 20.655,0.835 20.655,0.374 20.791,0.237 22.025,0.237 22.323,0.536 22.323,0.792 22.322,1.154 22.681,1.513 23.274,1.513 23.464,1.323 23.671,1.323 23.795,1.448 23.795,1.624 23.671,1.748 23.665,1.748 23.399,2.014 v2(23.399,2.183)
I2C_A_SCL_GAP: GAP1.C1 U11.16 | length 39.4
  Top Sig/Pwr w0.075: v1(17.996,6.106) 17.996,6.092 18.044,6.044 18.744,6.044 18.825,6.125 GAP1.C1@18.825,6.4
  GND1 w0.075: v3(17.812,6.047) 17.845,6.047 17.881,6.082 17.972,6.082 v1(17.996,6.106)
  Sig2 w0.075: v4(10.568,0.3) 10.611,0.343 10.82,0.343 11.189,0.712 12.621,0.712 12.694,0.639 13.568,0.639 13.819,0.387 21.912,0.387 22.175,0.65 22.175,1.174 22.529,1.528 22.534,1.528 23.005,1.999 23.005,2.04 23.401,2.435 23.401,2.471 23.42,2.491 24.432,3.503 24.432,4.358 24.188,4.602 24.188,4.634 23.967,4.854 23.139,4.854 23.013,4.728 22.524,4.728 22.31,4.515 20.207,4.515 19.95,4.515 19.887,4.578 18.936,4.578 17.637,5.877 v4(17.637,5.881)
  GND3 w0.075: v2(8.05,5.482) 8.071,5.461 8.263,5.461 v2(8.591,5.789) ; v2(9.55,6.406) 9.574,6.43 9.724,6.43 9.921,6.627 10.206,6.627 10.268,6.565 10.334,6.565 10.378,6.608 10.562,6.608 v2(10.586,6.632) ; v6(10.775,0.3) 10.777,0.302 10.982,0.302 v2(10.984,0.304)
  Sig1 w0.075: v4(17.637,5.881) 17.641,5.881 17.807,6.047 v3(17.812,6.047)
  Pwr w0.075: v4(10.568,0.3) v6(10.775,0.3)
  Bot Sig/Pwr w0.075: v2(8.05,5.482) 8.05,5.448 7.945,5.344 7.945,5.056 8.043,4.958 8.043,4.337 7.825,4.118 7.825,2.82 7.967,2.677 7.967,1.196 8.194,0.968 8.859,0.304 v2(10.984,0.304) ; v2(8.591,5.789) 8.929,5.789 9.547,6.406 v2(9.55,6.406) ; v2(10.586,6.632) 10.62,6.632 10.738,6.751 11.987,6.751 12.2,6.538 U11.16@12.2,6.338
I2C_A_SDA: J2.35 R27.2 U3.A3 U5.K12 U11.12 U15.B1 U21.14 | length 52.5
  Top Sig/Pwr w0.075: v1(12.872,8.118) 12.886,8.104 12.886,7.789 U5.K12@12.9,7.775 ; U21.14@22.15,12.6 22.153,12.597 v1(22.565,12.597) ; v1(26.692,7.543) 26.716,7.567 26.716,7.747 26.763,7.793 26.763,8.672 26.693,8.741 v1(26.693,8.775)
  GND1 w0.075: v1(12.872,8.118) 12.875,8.115 13.022,8.115 v3(13.025,8.112) ; v1(22.565,12.597) 22.599,12.597 22.651,12.65 22.878,12.65 v3(22.889,12.661) ; v1(23.976,2.209) 23.994,2.209 24.118,2.333 v3(24.136,2.333) ; v3(26.688,9.188) 26.691,9.185 26.691,8.778 v1(26.693,8.775) ; v1(26.692,7.543) 26.696,7.539 26.696,7.381 v3(26.7,7.377)
  GND3 w0.075: v2(7.811,7.569) 7.811,7.553 7.898,7.466 v6(7.898,7.45) ; v6(9.285,5.909) 9.636,5.558 10.577,5.558 10.581,5.562 10.749,5.562 10.897,5.709 v2(10.902,5.709) 10.902,5.694 11.004,5.592 11.004,5.55 11.061,5.493 11.061,5.403 11.508,4.956 11.848,4.956 12.693,5.8 12.714,5.8 12.804,5.891 13.038,5.891 13.319,6.171 13.319,6.307 v2(13.343,6.331) ; v6(12.819,8.43) 12.842,8.43 12.907,8.366 v2(12.93,8.366) ; v2(23.583,1.536) 23.583,1.516 23.779,1.32 v6(23.779,1.3)
  Sig1 w0.075: v3(13.025,8.112) 13.001,8.136 13.001,8.186 12.858,8.329 v4(12.858,8.39) 12.596,8.651 12.596,9.627 12.905,9.935 12.905,10.111 12.477,10.539 12.477,11.992 13.384,12.899 13.384,13.286 13.639,13.542 13.705,13.542 14.252,14.089 14.388,14.089 v4(14.68,13.796) ; v4(22.731,12.533) 22.745,12.519 23.168,12.519 23.758,11.93 23.758,11.767 23.913,11.611 23.913,11.255 24.067,11.101 24.236,11.101 24.287,11.05 24.8,11.05 26.662,9.188 v3(26.688,9.188) ; v4@22.735,12.522 22.874,12.661 v3(22.889,12.661) ; v3(24.136,2.333) 24.112,2.309 24.112,2.152 24.06,2.099 24.06,1.552 24.362,1.25 v4(24.489,1.25) ; v3@24.152,2.366 24.751,2.366 24.899,2.4 24.912,2.413 25.25,2.413 26.461,3.624 26.461,5.598 26.388,5.671 26.388,6.308 26.645,6.565 26.645,7.23 26.676,7.261 26.676,7.353 v3(26.7,7.377)
  Pwr w0.075: v6(7.898,7.45) 7.922,7.426 7.994,7.426 8.053,7.367 8.053,7.028 8.287,6.794 8.323,6.794 8.753,6.364 8.83,6.364 v6(9.285,5.909) ; v6(12.819,8.43) 12.819,8.429 v4(12.858,8.39) ; v4(14.68,13.796) 14.723,13.753 14.908,13.753 16.311,12.351 17.03,12.351 17.643,12.963 18.261,12.963 18.297,12.999 18.358,12.999 18.402,13.043 18.402,13.378 18.962,13.938 20.264,13.938 21.169,13.033 21.56,13.011 22.079,12.837 22.146,12.837 22.285,12.799 v4(22.731,12.533) ; v6@23.767,1.307 23.784,1.324 23.891,1.324 23.916,1.349 24.252,1.349 24.352,1.25 v4(24.489,1.25)
  Bot Sig/Pwr w0.075: J2.35@7.345,7.65 7.729,7.65 v2(7.811,7.569) ; v2(12.93,8.366) 12.93,7.908 12.971,7.867 12.971,7.406 12.826,7.262 12.549,6.941 12.545,6.831 12.545,6.786 12.551,6.763 12.664,6.65 12.793,6.521 13.225,6.521 13.315,6.431 13.315,6.394 13.343,6.365 v2(13.343,6.331) ; v2(19.55,2.075) 19.991,2.075 20.128,1.937 20.572,1.937 20.638,2.003 20.638,2.233 20.854,2.45 21.039,2.45 21.126,2.537 21.647,2.537 21.682,2.502 21.858,2.502 21.868,2.511 21.959,2.511 22.027,2.442 22.027,2.371 22.251,2.147 22.259,2.147 22.302,2.103 22.302,1.853 22.368,1.787 22.479,1.787 22.604,1.663 23.422,1.663 23.549,1.536 v2(23.583,1.536)
I2C_A_SDA_GAP: GAP1.F4 U11.13 | length 36.8
  GND1 w0.075: v3(19.641,7.162) 19.641,7.196 19.766,7.321 19.766,7.46 v1(19.79,7.484)
  Sig2 w0.075: v4(11.148,0.3) 11.148,0.323 11.388,0.562 12.559,0.562 12.632,0.489 13.506,0.489 13.757,0.237 21.975,0.237 22.325,0.588 22.325,1.112 22.591,1.378 22.596,1.378 23.551,2.333 23.551,2.409 23.689,2.548 24.582,3.441 24.582,4.42 24.551,4.451 24.551,4.455 24.338,4.668 24.338,4.696 24.029,5.004 22.516,5.004 v4(22.503,4.991)
  GND3 w0.075: v2(8.158,5.144) v2(8.158,5.144) 8.473,5.458 8.633,5.458 v2(8.657,5.482) ; v2(9.55,5.981) 9.55,5.953 9.795,5.708 10.515,5.708 10.519,5.712 10.62,5.712 10.674,5.766 10.674,5.781 10.713,5.821 10.713,5.992 v2(10.737,6.016) ; v2(10.864,0.672) 10.898,0.672 10.972,0.598 11.043,0.598 11.166,0.475 v6(11.2,0.475)
  Sig1 w0.075: v3(19.641,7.162) 19.641,7.132 19.48,6.97 19.48,6.866 19.346,6.733 19.346,5.428 19.463,5.311 19.463,5.085 19.298,4.92 19.298,4.742 19.404,4.636 19.411,4.636 19.472,4.575 19.601,4.575 19.662,4.515 20.956,4.515 21.201,4.76 22.075,4.76 22.267,4.951 22.463,4.951 v4(22.503,4.991)
  Pwr w0.075: v4(11.148,0.3) 11.176,0.328 11.176,0.451 v6(11.2,0.475)
  Bot Sig/Pwr w0.075: v2(8.158,5.144) 8.182,5.12 8.182,5.032 8.193,5.02 8.193,4.275 7.975,4.056 7.975,2.882 8.117,2.739 8.117,1.258 8.896,0.479 10.671,0.479 v2(10.864,0.672) ; v2(8.657,5.482) 8.814,5.639 8.991,5.639 9.334,5.981 v2(9.55,5.981) ; v2(10.737,6.016) 10.753,6.016 10.821,6.083 10.938,6.083 11,6.145 U11.13@11,6.338
I2C_B_SCL: J2.30 J5.3 R28.2 U5.E4 U11.9 | length 17.3
  Top Sig/Pwr w0.075: J5.3@6.818,12.636 7.477,12.636 7.912,12.2 7.912,11.667 v1(8.084,11.496)
  GND1 w0.075: v3(7.976,11.366) 7.976,11.377 8.084,11.485 v1(8.084,11.496) ; v1(11.149,4.973) 11.159,4.983 11.275,4.983 v3(11.285,4.993)
  GND3 w0.075: v2(7.299,9.639) 7.552,9.639 7.685,9.772 v6(7.719,9.772) ; v2(10.845,4.523) 10.869,4.547 10.869,4.725 10.936,4.791 v6(10.936,4.825) ; v2(11.666,5.168) 11.909,5.411 12.091,5.411 12.462,5.782 v2(12.462,6.013) ; v2(12.576,6.438) 12.578,6.441 12.578,6.676 12.755,6.853 v2(12.762,6.853) ; v6(13.285,9.188) 13.309,9.164 13.309,9.104 13.362,9.051 v2(13.362,9.019)
  Sig1 w0.075: v4(7.909,11.227) 7.909,11.299 v3(7.976,11.366) ; v4(11.261,4.905) 11.261,4.969 v3(11.285,4.993)
  Pwr w0.075: v4(7.909,11.227) 7.909,10.588 7.719,10.399 7.719,10.395 7.677,10.353 7.677,10.136 7.719,10.094 v6(7.719,9.772) 7.945,9.772 7.969,9.748 8.621,9.748 8.655,9.781 8.925,9.781 9.423,9.283 10.947,9.283 10.976,9.254 12.29,9.254 12.348,9.313 12.984,9.313 13.084,9.212 13.262,9.212 v6(13.285,9.188) ; v6(10.936,4.825) 10.97,4.825 11.022,4.878 11.234,4.878 v4(11.261,4.905)
  Bot Sig/Pwr w0.075: U11.9@10.843,4.537 11.006,4.537 11.637,5.168 v2(11.666,5.168) ; v2(10.845,4.523) 10.848,4.523 U11.9@10.85,4.525 ; v2(12.462,6.013) 12.462,6.29 12.576,6.404 v2(12.576,6.438) ; v2(12.762,6.853) 12.936,6.956 13.077,6.956 R28.2@13.171,7.05 13.171,7.88 13.143,7.908 13.143,8.548 13.362,8.768 v2(13.362,9.019)
I2C_B_SCL_GAP: GAP1.G5 U11.8 | length 32.5
  GND1 w0.075: v3(20.208,7.937) 20.239,7.937 20.255,7.921 20.289,7.921 v1(20.313,7.897)
  Sig2 w0.075: v4(20.382,7.997) 20.425,7.954 20.584,7.954 20.639,7.9 21.742,7.9 21.76,7.881 21.768,7.881 21.841,7.808 23.177,7.808 23.404,8.035 24.584,8.035 24.749,8.2 25.285,8.2 25.662,7.823 25.748,7.823 25.845,7.727 25.845,7.44 25.999,7.286 26.021,7.286 26.18,7.127 v4(26.233,7.127)
  GND3 w0.075: v2(11.358,2.712) v2(11.358,2.712) 11.357,2.499 11.319,2.462 11.319,2.37 11.444,2.246 11.62,2.246 11.663,2.289 11.714,2.289 11.831,2.407 11.893,2.407 11.969,2.332 v2(12.193,2.332) ; v2(12.413,1.064) 12.582,0.895 13.08,0.895 13.737,0.237 20.024,0.237 20.086,0.3 v6(20.12,0.3)
  Sig1 w0.075: v3(20.208,7.937) 20.232,7.961 20.346,7.961 v4(20.382,7.997)
  Pwr w0.075: v6(20.12,0.3) 20.134,0.286 20.476,0.286 20.525,0.237 21.958,0.237 22.337,0.617 22.337,1.105 22.447,1.215 cw(c23,0.85) 22.635,1.403 22.745,1.513 26.374,1.513 26.763,1.901 26.763,3.255 26.611,3.406 26.611,5.133 26.27,5.474 26.27,6.403 26.495,6.628 26.495,6.845 26.233,7.107 v4(26.233,7.127)
  Bot Sig/Pwr w0.075: U11.8@11,3.938 11,3.489 11.044,3.445 11.044,3.035 11.358,2.721 v2(11.358,2.712) ; v2(12.193,2.332) 12.193,1.283 v2(12.413,1.064)
I2C_B_SDA: J2.32 J5.5 R29.2 U5.K2 U11.4 | length 23.5
  Top Sig/Pwr w0.075: J5.5@6.818,12.286 7.614,12.286 7.762,12.138 7.762,11.517 v1(8.157,11.122) ; v1(12.618,3.981) 12.618,3.987 12.9,4.269 U5.K2@12.9,4.275
  GND1 w0.075: v1(8.157,11.122) 8.175,11.122 8.254,11.044 v3(8.272,11.044) ; v1(12.618,3.981) 12.618,4.013 12.766,4.161 v3(12.766,4.193)
  Sig2 w0.075: v4(10.391,11.291) 10.434,11.291 v4@10.475,11.333 ; v4@10.476,11.332 11.218,11.332 11.612,10.938 11.612,7.463 11.837,7.238 11.837,6.716 11.991,6.563 12.287,6.563 12.562,6.837 14.785,6.837 14.976,6.646 14.976,6.436 14.768,6.228 14.768,6.199 14.657,6.088 14.657,5.905 14.603,5.852 14.603,5.573 14.264,5.234 13.948,5.234 v4(13.533,5.649) 13.246,5.65 12.909,5.312 12.909,5.046 12.895,5.033 12.895,4.759 12.751,4.615 v4(12.751,4.554)
  GND3 w0.075: v2(8.164,10.72) 8.164,10.732 8.265,10.833 v6(8.265,10.846) ; v2(12.226,4.544) 12.233,4.551 12.42,4.551 v6(12.427,4.558) ; v6(13.146,5.516) 13.146,5.522 v2(13.152,5.528)
  Sig1 w0.075: v3(8.272,11.044) 8.361,10.955 v4(8.361,10.936) 8.67,10.936 8.772,11.037 8.804,11.037 8.954,11.188 8.954,11.296 9.385,11.727 9.788,11.727 9.917,11.856 10.239,11.856 10.391,11.704 10.391,11.323 v4@10.362,11.295 ; v4(12.751,4.554) 12.758,4.546 12.758,4.2 v3(12.766,4.193)
  Pwr w0.075: v6(8.265,10.846) 8.355,10.936 v4(8.361,10.936) ; v6(12.427,4.558) 12.461,4.558 12.554,4.465 12.634,4.465 12.723,4.554 v4(12.751,4.554) ; v6(13.146,5.516) 13.166,5.536 13.358,5.536 13.472,5.649 v4(13.533,5.649)
  Bot Sig/Pwr w0.075: J2.32@7.345,8.85 7.565,8.85 7.932,9.217 7.932,9.426 7.938,9.431 7.938,10.032 7.957,10.051 7.957,10.331 8.067,10.441 8.067,10.589 8.164,10.686 v2(8.164,10.72) ; v2(13.152,5.528) 13.155,5.525 R29.2@13.171,5.525